# Altium PCB LED_PCB.PcbDoc (part 1 of 4)
Units mil, origin at the board's own origin, x right, y up, seen from the top; angles counter-clockwise.
Board outline 8000 x 4000 mil, 2 copper layers (Top Layer, Bottom Layer); 187 components, 303 nets, 1415 pads, 387 vias.
Unrouted connection lines stored in the file: 1.
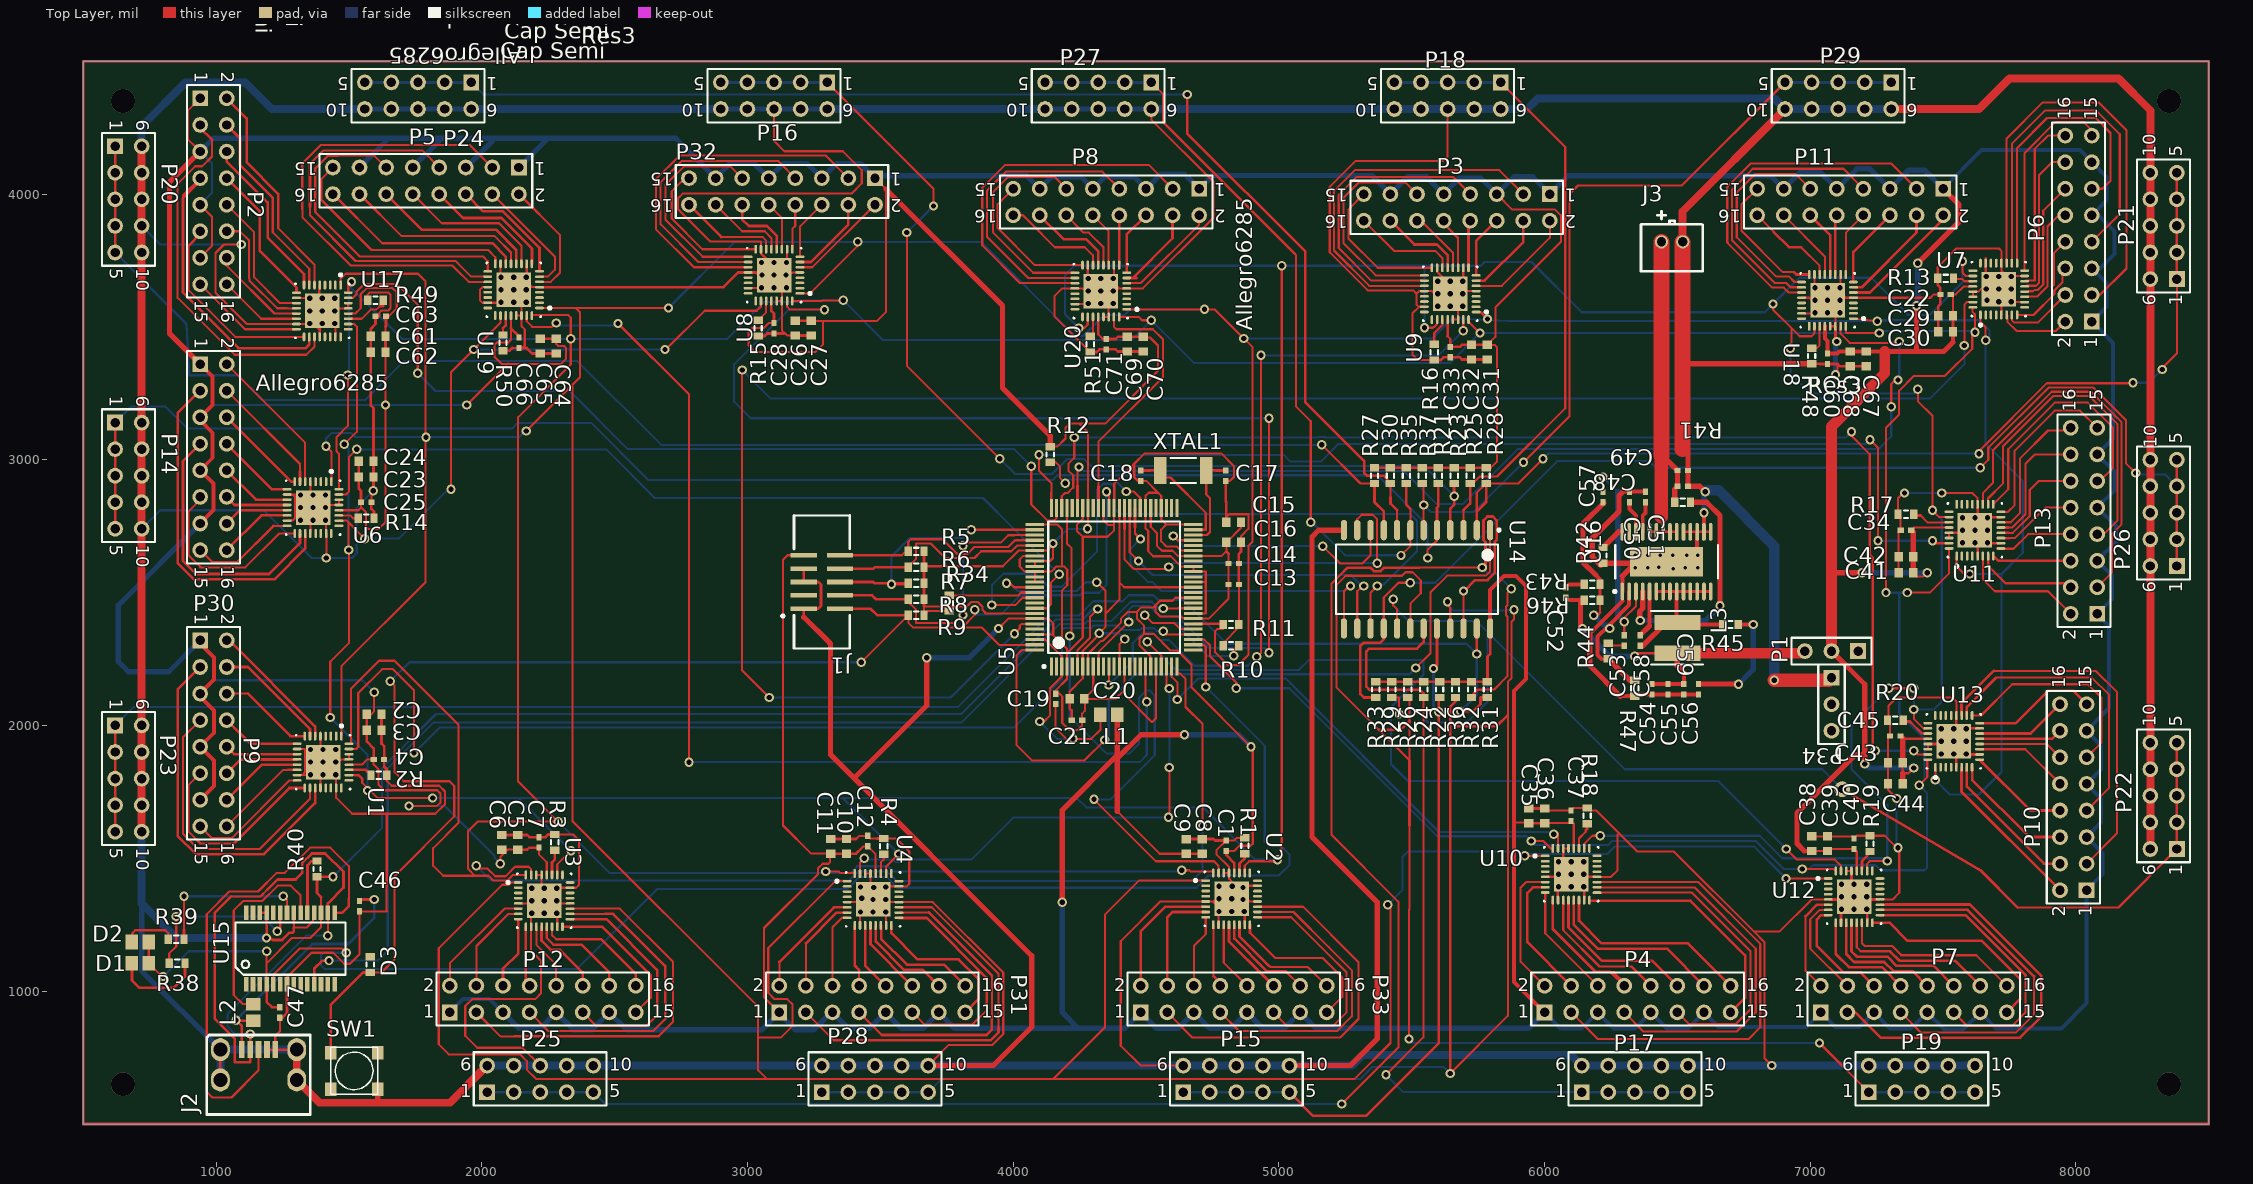
[diagram p0: Top Layer view]
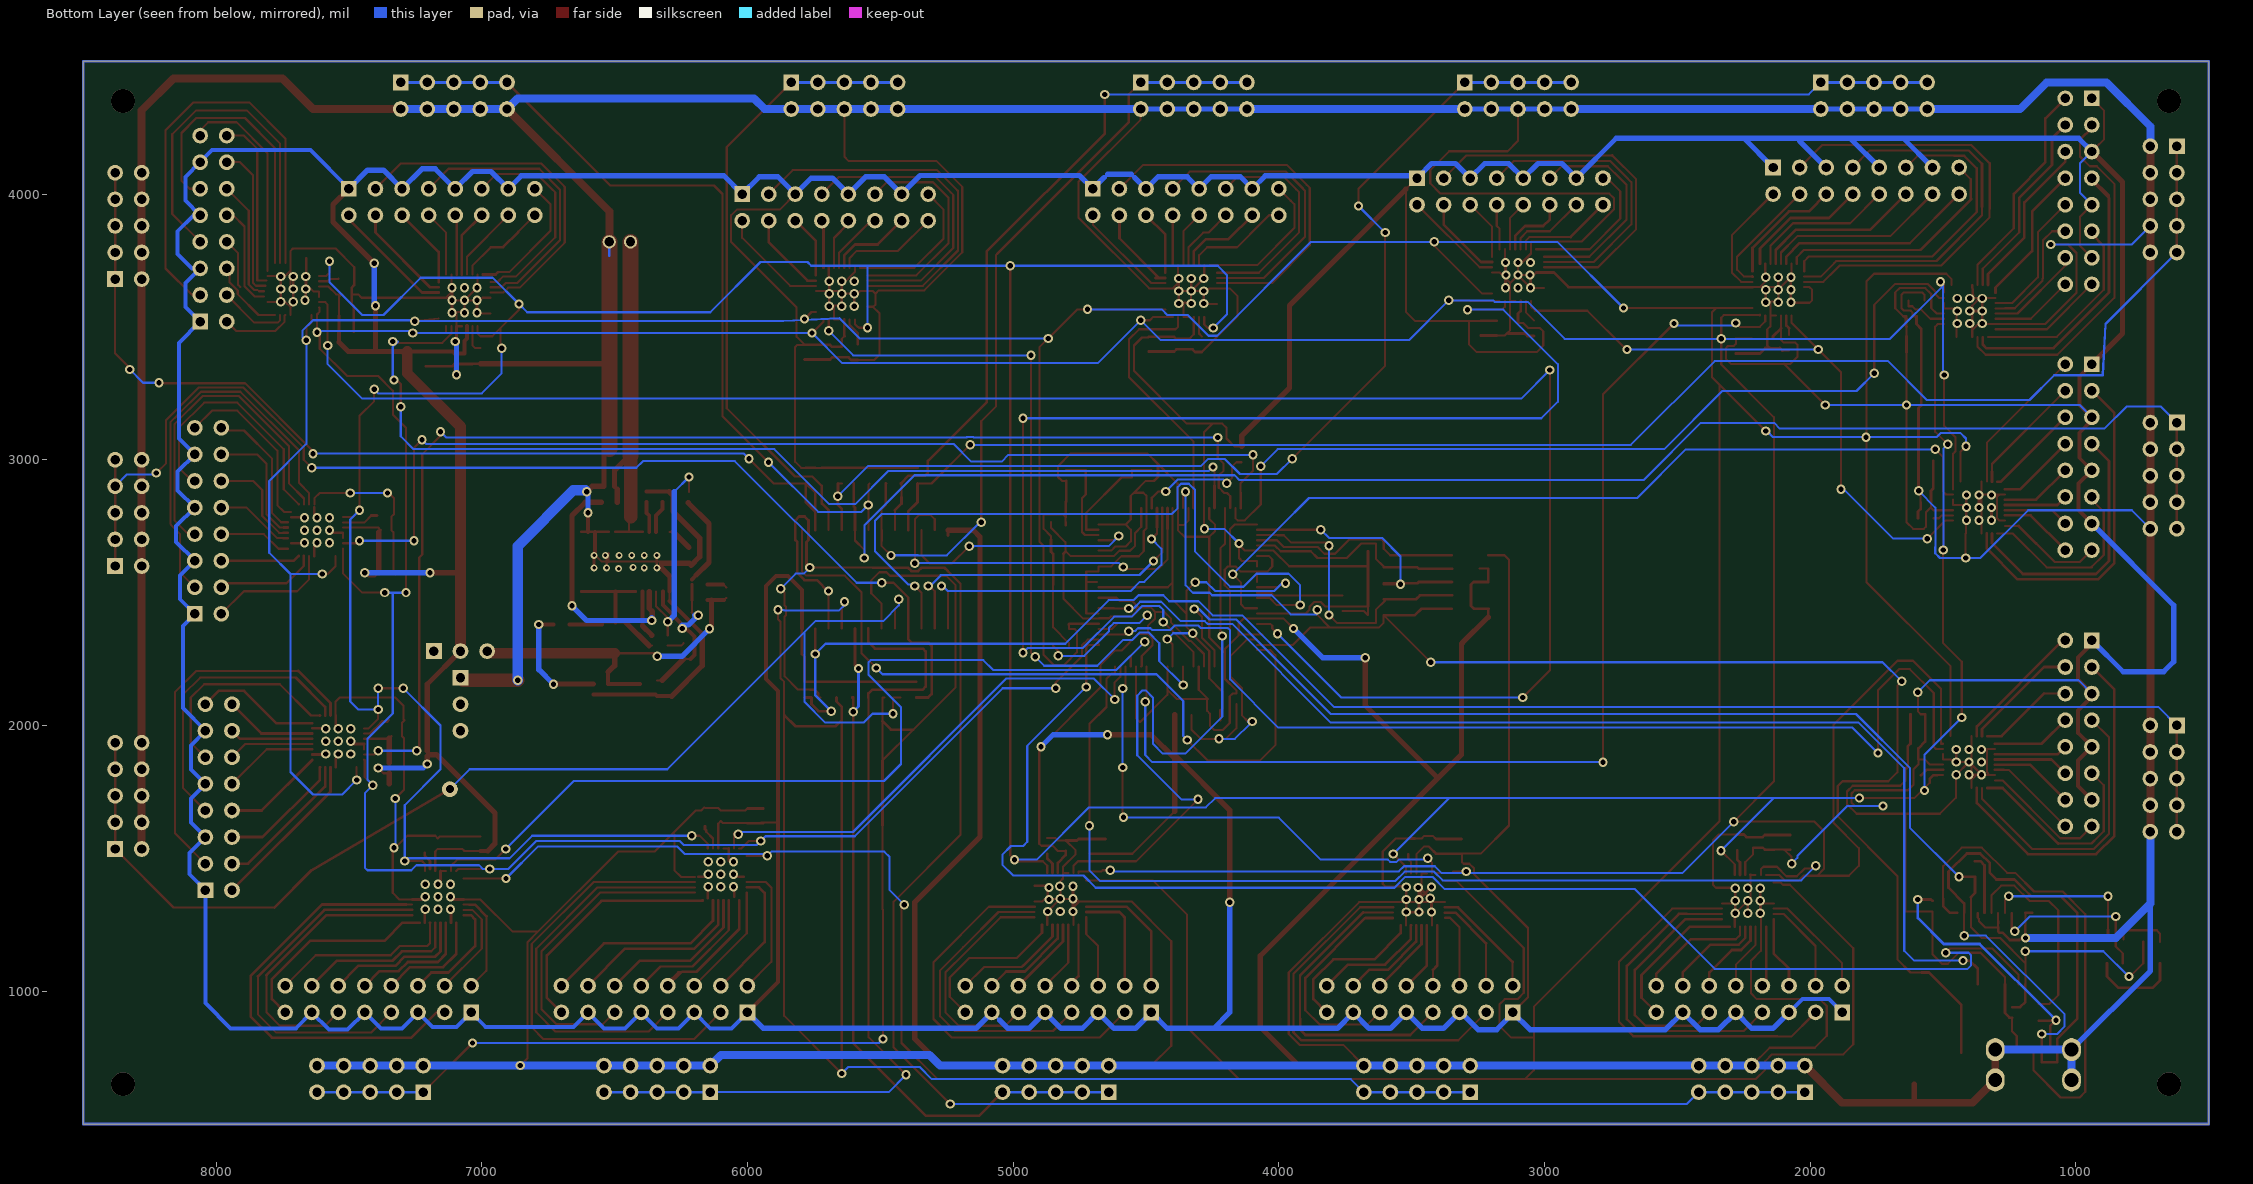
[diagram p1: Bottom Layer view, seen from below]

## Layer stack, top to bottom
Top Layer: signal copper 1.4
Dielectric: dielectric 12.6, FR-4, Dk 4.8
Bottom Layer: signal copper 1.4

## Board outline
500,500 500,4500 8500,4500 8500,500

## Design rules (kind name [scope] priority, off if disabled: settings)
Clearance [All] p1: gap=8
PolygonConnect [All] p1: connectstyle=Relief reliefconductorwidth=10 reliefentries=4 polygonreliefangle="90 Angle"
RoomDefinition NEWLED [InComponentClass('NEWLED')] p1: confinementstyle=ConfineIn formatcopy=TRUE lockcomponents=FALSE outline 8545,555 13415,555 13415,925 8545,925
RoomDefinition POWER [InComponentClass('POWER')] p2: confinementstyle=ConfineIn formatcopy=TRUE lockcomponents=FALSE outline 8710,870 13650,870 13650,1390 8710,1390
RoomDefinition USB [InComponentClass('USB')] p3: confinementstyle=ConfineIn formatcopy=TRUE lockcomponents=FALSE outline 7045,5780 9680,5780 9680,6295 7045,6295
RoomDefinition TILE_DEMUX [InComponentClass('TILE_DEMUX')] p4: confinementstyle=ConfineIn formatcopy=TRUE lockcomponents=FALSE outline 7045,4980 14775,4980 14775,5730 7045,5730
RoomDefinition REDLED [InComponentClass('REDLED')] p5: confinementstyle=ConfineIn formatcopy=TRUE lockcomponents=FALSE outline 7045,4560 11925,4560 11925,4930 7045,4930
RoomDefinition LED_HEADERS [InComponentClass('LED_HEADERS')] p6: confinementstyle=ConfineIn formatcopy=TRUE lockcomponents=FALSE outline 6405,6715 9465,6715 9465,8590 6405,8590
RoomDefinition GREENLED [InComponentClass('GREENLED')] p7: confinementstyle=ConfineIn formatcopy=TRUE lockcomponents=FALSE outline 9435,3130 14305,3130 14305,3500 9435,3500
RoomDefinition CPULED [InComponentClass('CPULED')] p8: confinementstyle=ConfineIn formatcopy=TRUE lockcomponents=FALSE outline 8990,1610 14660,1610 14660,2410 8990,2410
RoomDefinition BLUELED [InComponentClass('BLUELED')] p9: confinementstyle=ConfineIn formatcopy=TRUE lockcomponents=FALSE outline 9365,825 13425,825 13425,1195 9365,1195
RoutingVias [All] p1: holewidth=20 width=35 viastyle="Through Hole" minholewidth=20 minwidth=35 maxholewidth=20 maxwidth=35
SilkscreenOverComponentPads [All] p1: minsilkscreentomaskgap=10
SolderMaskExpansion [All] p1: expansion=4
Width "Schematic Width Constraint" [InNet('NetC46_2')] p1: maxlimit=20 minlimit=10 preferedwidth=10 minimp=50.000000 maximp=50.000000 favimp=50.000000
Width [All] p2: maxlimit=8 minlimit=8 preferedwidth=8 minimp=50.000000 maximp=50.000000 favimp=50.000000
27 further rules are at their usual default settings.

## Classes and differential pairs
component class NEWLED: C34 C35 C36 C37 C38 C39 C40 C41 C42 C43 C44 C45 R17 R18 R19 R20 U10 U11 U12 U13
component class TILE_DEMUX: P14 P15 P16 P17 P18 P19 P20 P21 P22 P23 P24 P25 P26 P27 P28 P29 P? R21 R22 R23 R24 R25 R26 R27 R28 R29 R30 R31 R32 R33 R35 R36 R37 U14
component class BLUELED: C1 C2 C3 C4 C5 C6 C7 C8 C9 C10 C11 C12 R1 R2 R3 R4 U1 U2 U3 U4
component class CPULED: C13 C14 C15 C16 C17 C18 C19 C20 C21 J1 J3 L1 R5 R6 R7 R8 R9 R10 R11 R12 R34 SW1 U5 XTAL1
component class GREENLED: C22 C23 C24 C25 C26 C27 C28 C29 C30 C31 C32 C33 R13 R14 R15 R16 U6 U7 U8 U9
component class LED_HEADERS: P2 P3 P4 P5 P6 P7 P8 P9 P10 P11 P12 P13 P30 P31 P32 P33
component class REDLED: C34 C35 C36 C37 C38 C39 C40 C41 C42 C43 C44 C45 R17 R18 R19 R20 U10 U11 U12 U13
component class USB: C46 C47 D1 D2 D3 J2 L2 R38 R39 R40 U15
component class POWER: C48 C49 C50 C51 C52 C53 C54 C55 C56 C57 C58 C59 L3 P1 R41 R42 R43 R44 R45 R46 R47 U16

## Components (designator, comment, footprint, x,y, rotation, side; value= is the part's Value field where it differs from the comment)
C1 "Cap Semi" CAPC1005L 4802.24,1547.24 r270 top
C2 "Cap Semi" CAPC1608L 1595.2,1982.24 r180 top
C3 "Cap Semi" CAPC1608L 1595.2,2042.24 r180 top
C4 "Cap Semi" CAPC1005L 1612.76,1872.24 r180 top
C5 "Cap Semi" CAPC1608L 2135,1560 r270 top
C6 "Cap Semi" CAPC1608L 2075,1560 r270 top
C7 "Cap Semi" CAPC1005L 2215,1560 r270 top
C8 "Cap Semi" CAPC1608L 4712.24,1544.8 r270 top
C9 "Cap Semi" CAPC1608L 4652.24,1544.8 r270 top
C10 "Cap Semi" CAPC1608L 3372.76,1545 r270 top
C11 "Cap Semi" CAPC1608L 3312.76,1545 r270 top
C12 "Cap Semi" CAPC1005L 3452.76,1564.68 r270 top
C13 "Cap Semi" CAPC1005L 4830,2530 r180 top
C14 "Cap Semi" CAPC1005L 4830,2610 r180 top
C15 "Cap Semi" CAPC1608L 4830,2765 r0 top
C16 "Cap Semi" CAPC1608L 4830,2690 r180 top
C17 "Cap Semi" CAPC1005L 4800,2940 r90 top
C18 "Cap Semi" CAPC1005L 4480,2940 r90 top
C19 "Cap Semi" CAPC1005L 4160,2100 r270 top
C20 "Cap Semi" CAPC1608L 4240,2100 r180 top
C21 "Cap Semi" CAPC1005L 4240,2020 r180 top
C22 "Cap Semi" CAPC1005L 7509.53,3622.44 r0 top
C23 "Cap Semi" CAPC1608L 1565,2935 r180 top
C24 "Cap Semi" CAPC1608L 1565,2995 r180 top
C25 "Cap Semi" CAPC1005L 1565,2840 r180 top
C26 "Cap Semi" CAPC1608L 3180,3495 r90 top
C27 "Cap Semi" CAPC1608L 3240,3495 r90 top
C28 "Cap Semi" CAPC1005L 3100,3495 r90 top
C29 "Cap Semi" CAPC1608L 7509.53,3542.44 r0 top
C30 "Cap Semi" CAPC1608L 7509.53,3482.44 r0 top
C31 "Cap Semi" CAPC1608L 5785,3405 r90 top
C32 "Cap Semi" CAPC1608L 5725,3405 r90 top
C33 "Cap Semi" CAPC1005L 5645,3405 r90 top
C34 "Cap Semi" CAPC1005L 7360,2735 r0 top
C35 "Cap Semi" CAPC1608L 5940,1660 r270 top
C36 "Cap Semi" CAPC1608L 6000,1660 r270 top
C37 "Cap Semi" CAPC1005L 6100,1660 r270 top
C38 "Cap Semi" CAPC1608L 7005,1555 r270 top
C39 "Cap Semi" CAPC1608L 7065,1555 r270 top
C40 "Cap Semi" CAPC1005L 7165,1555 r270 top
C41 "Cap Semi" CAPC1608L 7360,2575 r0 top
C42 "Cap Semi" CAPC1608L 7360,2635 r0 top
C43 "Cap Semi" CAPC1608L 7320,1860 r0 top
C44 "Cap Semi" CAPC1608L 7320,1780 r0 top
C45 "Cap Semi" CAPC1005L 7320,1960 r0 top
C46 "" CAPC1005L 1540,1320 r90 top
C47 "" CAPC1005L 1240,920 r90 top
C48 "Cap Semi" CAPC1005L 6520,2900 r0 top
C49 "Cap Semi" CAPC1005L 6520,2960 r0 top
C50 "Cap Semi" CAPC1005L 6320,2860 r90 top
C51 "Cap Semi" CAPC1005L 6380,2860 r90 top
C52 "Cap Semi" CAPC1005L 6080,2500 r90 top
C53 "Cap Semi" CAPC1005L 6300,2320 r270 top
C54 "Cap Semi" CAPC1005L 6404.13,2136.38 r90 top
C55 "Cap Semi" CAPC1005L 6464.13,2136.38 r90 top
C56 "Cap Semi" CAPC1005L 6524.13,2136.38 r90 top
C57 "Cap Semi" CAPC1005L 6220,2860 r270 top
C58 "Cap Semi" CAPC1005L 6360,2320 r270 top
C59 "Cap Semi" CAPC1005L 6579.13,2136.38 r90 top
C60 "Cap Semi" CAPC1005L 7065,3380 r90 top
C61 "Cap Semi" CAPC1608L 1610,3465 r0 top
C62 "Cap Semi" CAPC1608L 1610,3405 r0 top
C63 "Cap Semi" CAPC1005L 1620,3540 r0 top
C64 "Cap Semi" CAPC1608L 2280,3427.56 r90 top
C65 "Cap Semi" CAPC1608L 2220,3427.56 r90 top
C66 "Cap Semi" CAPC1005L 2140,3440 r90 top
C67 "Cap Semi" CAPC1608L 7210,3380 r90 top
C68 "Cap Semi" CAPC1608L 7150,3380 r90 top
C69 "Cap Semi" CAPC1608L 4430,3435 r90 top
C70 "Cap Semi" CAPC1608L 4490,3435 r90 top
C71 "Cap Semi" CAPC1005L 4350,3435 r90 top
D1 "TXLED" INDC2012L 715,1105 r180 top
D2 "RXLED" INDC2012L 715,1185 r180 top
D3 "Diode" SurfaceMount(603) 1580,1100 r90 top
J1 "JTAG" JTAG-10 3280,2540 r270 top
J2 "USB" "USB Minib (thru-hole)" 1160,780 r90 top
J3 "Bat" BatteryConnJST 6480,3820 r0 top
L1 "Inductor" INDC2012L 4360,2040 r0 top
L2 "Inductor" INDC2012L 1140,920 r90 top
L3 "0.65uH" IndPow 6500,2330 r270 top
P1 "Header 3" HDR1X3 7180,2280 r180 top
P2 "Header 8X2" HDR2X8 940,4360 r270 top
P3 "Header 8X2" HDR2X8 6020,4000 r180 top
P4 "Header 8X2" HDR2X8 6000,920 r0 top
P5 "Header 8X2" HDR2X8 2140,4100 r180 top
P6 "Header 8X2" HDR2X8 8060,3520 r90 top
P7 "Header 8X2" HDR2X8 7040,920 r0 top
P8 "Header 8X2" HDR2X8 4700,4020 r180 top
P9 "Header 8X2" HDR2X8 940,2320 r270 top
P10 "Header 8X2" HDR2X8 8040,1380 r90 top
P11 "Header 8X2" HDR2X8 7500,4020 r180 top
P12 "Header 8X2" HDR2X8 1880,920 r0 top
P13 "Header 8X2" HDR2X8 8080,2420 r90 top
P14 "Header 5X2A" HDR2X5_CEN 620,3140 r270 top
P15 "Header 5X2A" HDR2X5_CEN 4640,620 r0 top
P16 "Header 5X2A" HDR2X5_CEN 3300,4420 r180 top
P17 "Header 5X2A" HDR2X5_CEN 6140,620 r0 top
P18 "Header 5X2A" HDR2X5_CEN 5835,4420 r180 top
P19 "Header 5X2A" HDR2X5_CEN 7220,620 r0 top
P20 "Header 5X2A" HDR2X5_CEN 620,4180 r270 top
P21 "Header 5X2A" HDR2X5_CEN 8380,3680 r90 top
P22 "Header 5X2A" HDR2X5_CEN 8380,1535 r90 top
P23 "Header 5X2A" HDR2X5_CEN 620,2000 r270 top
P24 "Header 5X2A" HDR2X5_CEN 1960,4420 r180 top
P25 "Header 5X2A" HDR2X5_CEN 2020,620 r0 top
P26 "Header 5X2A" HDR2X5_CEN 8380,2600 r90 top
P27 "Header 5X2A" HDR2X5_CEN 4520,4420 r180 top
P28 "Header 5X2A" HDR2X5_CEN 3280,620 r0 top
P29 "Header 5X2A" HDR2X5_CEN 7305,4420 r180 top
P30 "Header 8X2" HDR2X8 940,3360 r270 top
P31 "Header 8X2" HDR2X8 3120,920 r0 top
P32 "Header 8X2" HDR2X8 3480,4060 r180 top
P33 "Header 8X2" HDR2X8 4480,920 r0 top
P34 "Header 3" HDR1X3 7080,2180 r270 top (schematic designator P1)
R1 "Res3" RESC1608L 4872.24,1547.24 r270 top
R2 "Res3" RESC1608L 1612.76,1812.24 r180 top
R3 "Res3" RESC1608L 2275,1560 r270 top
R4 "Res3" RESC1608L 3512.76,1545 r270 top
R5 "Res3" RESC1608L 3635,2655 r0 top
R6 "Res3" RESC1608L 3635,2595 r0 top
R7 "Res3" RESC1608L 3635,2535 r0 top
R8 "Res3" RESC1608L 3635,2475 r0 top
R9 "Res3" RESC1608L 3635,2415 r0 top
R10 "Res3" RESC1608L 4820,2300 r0 top
R11 "Res3" RESC1608L 4820,2380 r180 top
R12 "Res3" RESC1608L 4140,3020 r90 top
R13 "Res3" RESC1608L 7509.53,3682.44 r0 top
R14 "Res3" RESC1608L 1565,2780 r180 top
R15 "Res3" RESC1608L 3040,3495 r90 top
R16 "Res3" RESC1608L 5585,3405 r90 top
R17 "Res3" RESC1608L 7360,2795 r0 top
R18 "Res3" RESC1608L 6160,1660 r270 top
R19 "Res3" RESC1608L 7225,1555 r270 top
R20 "Res3" RESC1608L 7320,2020 r0 top
R21 "Res3" RESC1608L 5600,2940 r90 top
R22 "Res3" RESC1608L 5605,2135 r90 top
R23 "Res3" RESC1608L 5660,2940 r90 top
R24 "Res3" RESC1608L 5545,2135 r90 top
R25 "Res3" RESC1608L 5720,2940 r90 top
R26 "Res3" RESC1608L 5485,2135 r90 top
R27 "Res3" RESC1608L 5360,2940 r90 top
R28 "Res3" RESC1608L 5780,2940 r90 top
R29 "Res3" RESC1608L 5425,2135 r90 top
R30 "Res3" RESC1608L 5420,2940 r90 top
R31 "Res3" RESC1608L 5785,2135 r90 top
R32 "Res3" RESC1608L 5725,2135 r90 top
R33 "Res3" RESC1608L 5365,2135 r90 top
R34 "Res3" RESC1608L 3760,2460 r90 top
R35 "Res3" RESC1608L 5480,2940 r90 top
R36 "Res3" RESC1608L 5665,2135 r90 top
R37 "Res3" RESC1608L 5540,2940 r90 top
R38 "" RESC1608L 853.5,1105 r0 top
R39 "" RESC1608L 850,1195 r180 top
R40 "Res3" RESC1608L 1380,1460 r90 top
R41 "Res3" RESC1608L 6520,2840 r0 top
R42 "Res3" RESC1608L 6220,2640 r270 top
R43 "Res3" RESC1608L 6179.13,2531.38 r180 top
R44 "Res3" RESC1608L 6240,2280 r270 top
R45 "Res3" RESC1608L 6700,2380 r180 top
R46 "Res3" RESC1608L 6179.13,2471.38 r180 top
R47 "Res3" RESC1608L 6340,2140 r90 top
R48 "Res3" RESC1608L 7005,3390.47 r90 top
R49 "Res3" RESC1608L 1600,3600 r0 top
R50 "Res3" RESC1608L 2080,3440 r90 top
R51 "Res3" RESC1608L 4290,3435 r90 top
SW1 "Switch-TL3315" Switch-TL3315 1520,700 r0 top
U1 "Allegro6285" QFN-32 1402.76,1862.24 r270 top
U2 "Allegro6285" QFN-32 4822.24,1347.24 r0 top
U3 "Allegro6285" QFN-32 2235,1340 r0 top
U4 "Allegro6285" QFN-32 3472.76,1345 r0 top
U5 "LM3S8962" LQFP-100 4380,2520 r90 top
U6 "Allegro6285" QFN-32 1365,2820 r270 top
U7 "Allegro6285" QFN-32 7709.53,3642.44 r90 top
U8 "Allegro6285" QFN-32 3100,3695 r180 top
U9 "Allegro6285" QFN-32 5645,3625 r180 top
U10 "Allegro6285" QFN-32 6100,1440 r0 top
U11 "Allegro6285" QFN-32 7620,2735 r90 top
U12 "Allegro6285" QFN-32 7165,1355 r0 top
U13 "Allegro6285" QFN-32 7540,1940 r90 top
U14 "MUX" SOIC-24MUX 5520,2550 r270 top
U15 "FT232RL" SSOP-28 1280,1160 r0 top
U16 "Power" TSOP_28_PowerPad 6459.13,2616.38 r90 top
U17 "Allegro6285" QFN-32 1400,3560 r270 top
U18 "Allegro6285" QFN-32 7065,3600 r180 top
U19 "Allegro6285" QFN-32 2120,3640 r180 top
U20 "Allegro6285" QFN-32 4330,3635 r180 top
XTAL1 "8 MHz" RESC5025L 4640,2960 r180 top

## Footprints (in the part's own frame and the unit in brackets; to place one, negate y for a bottom-side part, rotate by r counter-clockwise, add the part's x,y. Pads: shape width x height; smd on the part's side, far side on the other; paste and mask are expansions set on the pad)
BatteryConnJST [mil] "Connector for Battery"
  round 50 hole 35: 1(-40,0) 2(40,0)
  silkscreen extent -117,-110 116,115
CAPC1005L [mm] "Chip Capacitor, Body 1.0x0.5mm, IPC High Density"
  rect 0.6x0.5 smd: 1(-0.5,0) 2(0.5,0)
  body extent -0.55,-0.3 0.55,0.3, height 1.3
CAPC1608L [mm] "Chip Capacitor, Body 1.6x0.8mm, IPC High Density"
  rect 0.8x0.9 smd: 1(-0.7,0) 2(0.7,0)
  body extent -0.87,-0.48 0.87,0.48, height 1.3
HDR1X3 [mm] "Connector; Header; 3 Position"
  rect 1.5x1.5 hole 0.9: 1(0,0)
  round 1.5 hole 0.9: 2(2.54,0) 3(5.08,0)
  silkscreen extent -1.27,-1.27 6.35,1.27
HDR2X5_CEN [mm] "Connector; Header; 5x2 Position"
  rect 1.5x1.5 hole 0.9: 1(0,0)
  round 1.5 hole 0.9: 2(2.54,0) 3(5.08,0) 4(7.62,0) 5(10.16,0) 6(0,2.54) 7(2.54,2.54) 8(5.08,2.54) 9(7.62,2.54) 10(10.16,2.54)
  silkscreen extent -1.27,-1.27 11.43,3.81
HDR2X8 [mm] "Connector; Header; 8x2 Position"
  rect 1.5x1.5 hole 0.9: 1(0,0)
  round 1.5 hole 0.9: 2(0,2.54) 3(2.54,0) 4(2.54,2.54) 5(5.08,0) 6(5.08,2.54) 7(7.62,0) 8(7.62,2.54) 9(10.16,0) 10(10.16,2.54) 11(12.7,0) 12(12.7,2.54) 13(15.24,0) 14(15.24,2.54) 15(17.78,0) 16(17.78,2.54)
  silkscreen extent -1.27,-1.27 19.05,3.81
INDC2012L [mm] "Chip Inductor, Body 2.0x1.2mm, IPC High Density"
  rect 1.2x1.4 smd: 1(-0.8,0) 2(0.8,0)
  body extent -1.1,-0.7 1.1,0.7, height 0.55
IndPow [mil]
  rect 56.5x173 smd: 1(-58.25,0) 2(58.25,0)
  silkscreen extent -100,-100 100,97
JTAG-10 [mm] "Connector, Socket Strip, Double Row, SMT, 20 Position, Vertical, Pitch 2mm, Body 20 x 4 mm (LxW)"
  rect 0.44x2.5 smd: 1(-2.56,-1.73) 2(-2.56,1.73) 3(-1.28,-1.73) 4(-1.28,1.73) 5(0,-1.73) 6(0,1.73) 7(1.28,-1.73) 8(1.28,1.73) 9(2.56,-1.73) 10(2.56,1.73)
  silkscreen extent -6.35,-3.86 6.35,2.67, body extent -6.35,-2.01 6.35,2.03, height 3.56
LQFP-100 [mm] "100-Pin LQFP Package"
  rect 1.75x0.3 smd: 1(-7.575,6) 2(-7.575,5.5) 3(-7.575,5) 4(-7.575,4.5) 5(-7.575,4) 6(-7.575,3.5) 7(-7.575,3) 8(-7.575,2.5) 9(-7.575,2) 10(-7.575,1.5) 11(-7.575,1) 12(-7.575,0.5) 13(-7.575,0) 14(-7.575,-0.5) 15(-7.575,-1) 16(-7.575,-1.5) 17(-7.575,-2) 18(-7.575,-2.5) 19(-7.575,-3) 20(-7.575,-3.5) 21(-7.575,-4) 22(-7.575,-4.5) 23(-7.575,-5) 24(-7.575,-5.5) 25(-7.575,-6) 51(7.575,-6) 52(7.575,-5.5) 53(7.575,-5) 54(7.575,-4.5) 55(7.575,-4) 56(7.575,-3.5) 57(7.575,-3) 58(7.575,-2.5) 59(7.575,-2) 60(7.575,-1.5) 61(7.575,-1) 62(7.575,-0.5) 63(7.575,0) 64(7.575,0.5) 65(7.575,1) 66(7.575,1.5) 67(7.575,2) 68(7.575,2.5) 69(7.575,3) 70(7.575,3.5) 71(7.575,4) 72(7.575,4.5) 73(7.575,5) 74(7.575,5.5) 75(7.575,6)
  rect 0.3x1.75 smd: 26(-6,-7.575) 27(-5.5,-7.575) 28(-5,-7.575) 29(-4.5,-7.575) 30(-4,-7.575) 31(-3.5,-7.575) 32(-3,-7.575) 33(-2.5,-7.575) 34(-2,-7.575) 35(-1.5,-7.575) 36(-1,-7.575) 37(-0.5,-7.575) 38(0,-7.575) 39(0.5,-7.575) 40(1,-7.575) 41(1.5,-7.575) 42(2,-7.575) 43(2.5,-7.575) 44(3,-7.575) 45(3.5,-7.575) 46(4,-7.575) 47(4.5,-7.575) 48(5,-7.575) 49(5.5,-7.575) 50(6,-7.575) 76(6,7.575) 77(5.5,7.575) 78(5,7.575) 79(4.5,7.575) 80(4,7.575) 81(3.5,7.575) 82(3,7.575) 83(2.5,7.575) 84(2,7.575) 85(1.5,7.575) 86(1,7.575) 87(0.5,7.575) 88(0,7.575) 89(-0.5,7.575) 90(-1,7.575) 91(-1.5,7.575) 92(-2,7.575) 93(-2.5,7.575) 94(-3,7.575) 95(-3.5,7.575) 96(-4,7.575) 97(-4.5,7.575) 98(-5,7.575) 99(-5.5,7.575) 100(-6,7.575)
  silkscreen extent -7.7,-6.3 6.3,6.82, body extent -7,-7 7,7, height 1.6
QFN-32 [mm] "QFN, 32-Leads, Body 5.2x5.2mm (max), Pitch 0.50mm, IPC Medium Density"
  oval 0.85x0.25 smd: 1(-2.475,1.75) 2(-2.475,1.25) 3(-2.475,0.75) 4(-2.475,0.25) 5(-2.475,-0.25) 6(-2.475,-0.75) 7(-2.475,-1.25) 8(-2.475,-1.75) 17(2.475,-1.75) 18(2.475,-1.25) 19(2.475,-0.75) 20(2.475,-0.25) 21(2.475,0.25) 22(2.475,0.75) 23(2.475,1.25) 24(2.475,1.75)
  oval 0.25x0.85 smd: 9(-1.75,-2.475) 10(-1.25,-2.475) 11(-0.75,-2.475) 12(-0.25,-2.475) 13(0.25,-2.475) 14(0.75,-2.475) 15(1.25,-2.475) 16(1.75,-2.475) 25(1.75,2.475) 26(1.25,2.475) 27(0.75,2.475) 28(0.25,2.475) 29(-0.25,2.475) 30(-0.75,2.475) 31(-1.25,2.475) 32(-1.75,2.475)
  rect 3.3x3.3 smd: 33(0,0)
  silkscreen extent -3.57,-2.6 2.6,2.6, body extent -2.57,-2.58 2.58,2.57, height 1
RESC1608L [mm] "Chip Resistor, Body 1.6x0.8mm, IPC High Density"
  rect 0.7x0.9 smd: 1(-0.75,0) 2(0.75,0)
  silkscreen extent -0.2,-0.35 0.2,0.35, body extent -0.85,-0.48 0.85,0.48, height 0.9
RESC5025L [mm] "Chip Resistor, Body 5.0x2.5mm, IPC High Density"
  rect 1.2x2.6 smd: 1(-2.2,0) 2(2.2,0)
  silkscreen extent -1.2,-1.2 1.2,1.2, body extent -2.58,-1.33 2.58,1.33, height 0.9
SOIC-24MUX [mm] "SOIC, 24-Leads, Body 15.5x7.6mm (max), Pitch 1.27mm, IPC Medium Density"
  oval 1.95x0.6 smd: 1(-4.7,6.985) 2(-4.7,5.715) 3(-4.7,4.445) 4(-4.7,3.175) 5(-4.7,1.905) 6(-4.7,0.635) 7(-4.7,-0.635) 8(-4.7,-1.905) 9(-4.7,-3.175) 10(-4.7,-4.445) 11(-4.7,-5.715) 12(-4.7,-6.985) 13(4.7,-6.985) 14(4.7,-5.715) 15(4.7,-4.445) 16(4.7,-3.175) 17(4.7,-1.905) 18(4.7,-0.635) 19(4.7,0.635) 20(4.7,1.905) 21(4.7,3.175) 22(4.7,4.445) 23(4.7,5.715) 24(4.7,6.985)
  silkscreen extent -4.82,-7.75 3.33,7.96, body extent -3.8,-7.77 3.8,7.77, height 2.65
SSOP-28 [mm]
  rect 0.44x1.37 smd: 1(-4.225,-3.415) 2(-3.575,-3.415) 3(-2.925,-3.415) 4(-2.275,-3.415) 5(-1.625,-3.415) 6(-0.975,-3.415) 7(-0.325,-3.415) 8(0.325,-3.415) 9(0.975,-3.415) 10(1.625,-3.415) 11(2.275,-3.415) 12(2.925,-3.415) 13(3.575,-3.415) 14(4.225,-3.415) 15(4.225,3.415) 16(3.575,3.415) 17(2.925,3.415) 18(2.275,3.415) 19(1.625,3.415) 20(0.975,3.415) 21(0.325,3.415) 22(-0.325,3.415) 23(-0.975,3.415) 24(-1.625,3.415) 25(-2.275,3.415) 26(-2.925,3.415) 27(-3.575,3.415) 28(-4.225,3.415)
  silkscreen extent -5.25,-2.5 5.25,2.5
SurfaceMount(603) [mm]
  rect 0.7x0.9 smd: 1(-0.75,0) 2(0.75,0)
  silkscreen extent -0.2,-0.35 0.2,0.35, body extent -0.85,-0.48 0.85,0.48, height 0.9
Switch-TL3315 [mm] "Small SMD Tact Switch E-Switch TL3315"
  rect 1.1x1.3 smd: 1(-2.25,1.75) 2(2.25,1.75) 3(-2.25,-1.75) 4(2.25,-1.75)
  silkscreen extent -2.25,-2.25 2.25,2.25
TSOP_28_PowerPad [mm] "TSOP, 28-Leads, Body 9.8x4.5mm (max), Pitch 0.65mm, IPC Medium Density"
  oval 1.7x0.35 smd: 1(-2.85,4.225) 2(-2.85,3.575) 3(-2.85,2.925) 4(-2.85,2.275) 5(-2.85,1.625) 6(-2.85,0.975) 7(-2.85,0.325) 8(-2.85,-0.325) 9(-2.85,-0.975) 10(-2.85,-1.625) 11(-2.85,-2.275) 12(-2.85,-2.925) 13(-2.85,-3.575) 14(-2.85,-4.225) 15(2.85,-4.225) 16(2.85,-3.575) 17(2.85,-2.925) 18(2.85,-2.275) 19(2.85,-1.625) 20(2.85,-0.975) 21(2.85,-0.325) 22(2.85,0.325) 23(2.85,0.975) 24(2.85,1.625) 25(2.85,2.275) 26(2.85,2.925) 27(2.85,3.575) 28(2.85,4.225)
  rect 2.8x7 smd: 29(0,0)
  silkscreen extent -2.97,-4.9 1.6,5.07, body extent -2.25,-4.9 2.25,4.9, height 1.2
"USB Minib (thru-hole)" [mm]
  rect 1.65x0.55 smd: 1(0,1.6) 2(0,0.8) 3(0,0) 4(0,-0.8) 5(0,-1.6)
  oval 2.2x1.8 hole 1.321: 6(0,3.65) 7(-2.9,3.65) 8(-2.9,-3.65) 9(0,-3.65)
  silkscreen extent -6.2,-4.95 1.39,4.95

## Part data
C1 C2 C3 C4 C5 C6 C7 C8 C9 C10 C11 C12 C13 C14 C15 C16 C17 C18 C19 C20 C21 C22 C23 C24 C25 C26 C27 C28 C29 C30 C31 C32 C33 C34 C35 C36 C37 C38 C39 C40 C41 C42 C43 C44 C45 C48 C49 C50 C51 C52 C53 C54 C55 C56 C57 C58 C59 C60 C61 C62 C63 C64 C65 C66 C67 C68 C69 C70 C71: "Capacitor (Semiconductor SIM Model)"
C46 C47: library part Cap, "Capacitor"
D1 D2: library part LED2, "Typical RED, GREEN, YELLOW, AMBER GaAs LED"
D3: library part SchottkeyDiode
J1: library part "Header 5X2H", "Header, 5-Pin, Dual row, Right Angle"
J2: library part USB-ConnTH
J3: library part BatteryConnJST
L3: library part Inductor
P1 P34: "Header, 3-Pin"
P2 P3 P4 P5 P6 P7 P8 P9 P10 P11 P12 P13 P30 P31 P32 P33: "Header, 8-Pin, Dual row"
P14 P15 P16 P17 P18 P19 P20 P21 P22 P23 P24 P25 P26 P27 P28 P29: "Header, 5-Pin, Dual row"
R1 R2 R3 R4 R5 R6 R7 R8 R9 R10 R11 R12 R13 R14 R15 R16 R17 R18 R19 R20 R21 R22 R23 R24 R25 R26 R27 R28 R29 R30 R31 R32 R33 R34 R35 R36 R37 R40 R41 R42 R43 R44 R45 R46 R47 R48 R49 R50 R51: "Resistor"
R38 R39: library part Res1, "Resistor"
U16: library part Power_Switcher
XTAL1: library part XTAL, "Crystal Oscillator"

## Free pads (board coordinates)
  round 60 hole 30: 0(7120,1760)

## Via types
v1: diameter 35, hole 20, Top Layer to Bottom Layer, 371 vias
v2: diameter 25.98, hole 12.99, Top Layer to Bottom Layer, tented top, 12 vias
v3: diameter 89, hole 89, Top Layer to Bottom Layer, 4 vias

## Nets (pads, with @x,y where several pads share a name; then routed paths per layer and width w, separated by ;. In a path a pad name is that pad's centre, name@x,y a point inside that pad or via, vN(x,y) a via of type N, cw(c..) or ccw(c..) an arc to the next point about the centre after c; other vN are vias at no path point)
FTDI_RX: U5.26
FTDI_TX: U5.27 U15.5 | length 5371.5
  Top Layer w8: U15.5@1216.02,1025.55 1216.02,1062.02 1314.5,1160.5 1474.23,1160.5 v1(1490.23,1144.5) ; U5.27@4678.23,2303.46 4716.54,2303.46 4725,2295 v1(4725,2145)
  Top Layer w10: U5.27@4678.23,2303.46 U5.27@4679.76,2305
  Bottom Layer w8: v1(1490.23,1144.5) 1404,1144.5 1395.5,1136 1395.5,1096 1407.68,1083.82 2359.82,1083.82 2659.77,1383.77 3375.32,1383.77 3421.55,1430 3523.96,1430 3565,1388.96 ; 3565,1389 4689,1389 4735,1435 4999.35,1435 5040.5,1476.15 5040.5,1513.85 5007.88,1546.47 4962.5,1546.47 4947,1561.97 4947,1923 v1(4725,2145)